# Altium PCB PCB3.PcbDoc
Units mil, origin at the board's own origin, x right, y up, seen from the top; angles counter-clockwise.
Board outline 6000 x 4000 mil, 2 copper layers (Top Layer, Bottom Layer); 30 components, 23 nets, 99 pads, 3 vias.
Unrouted connection lines stored in the file: 30.
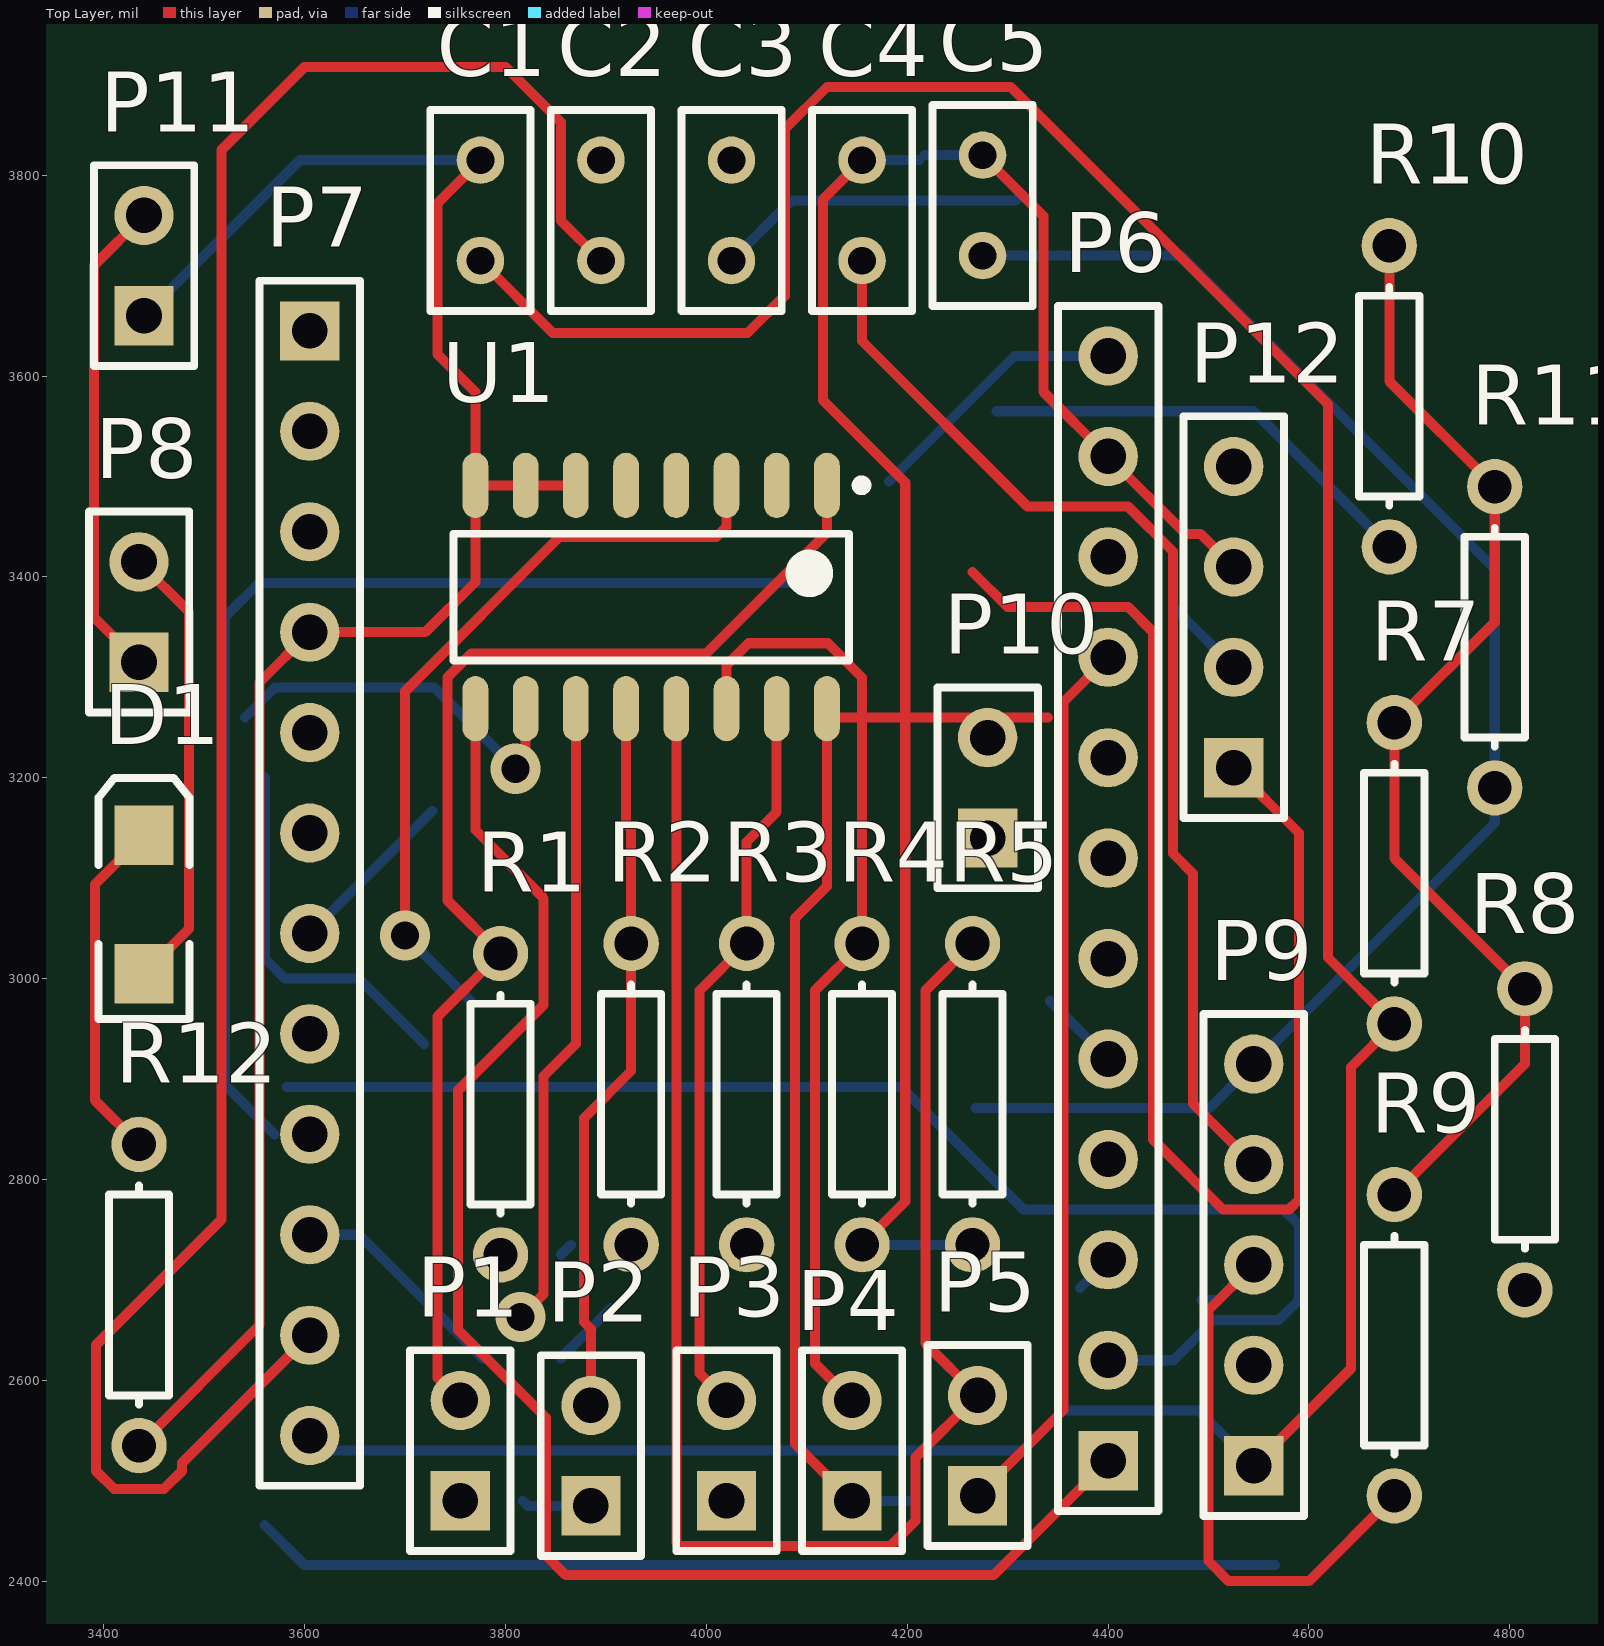
[diagram p0: Top Layer view]
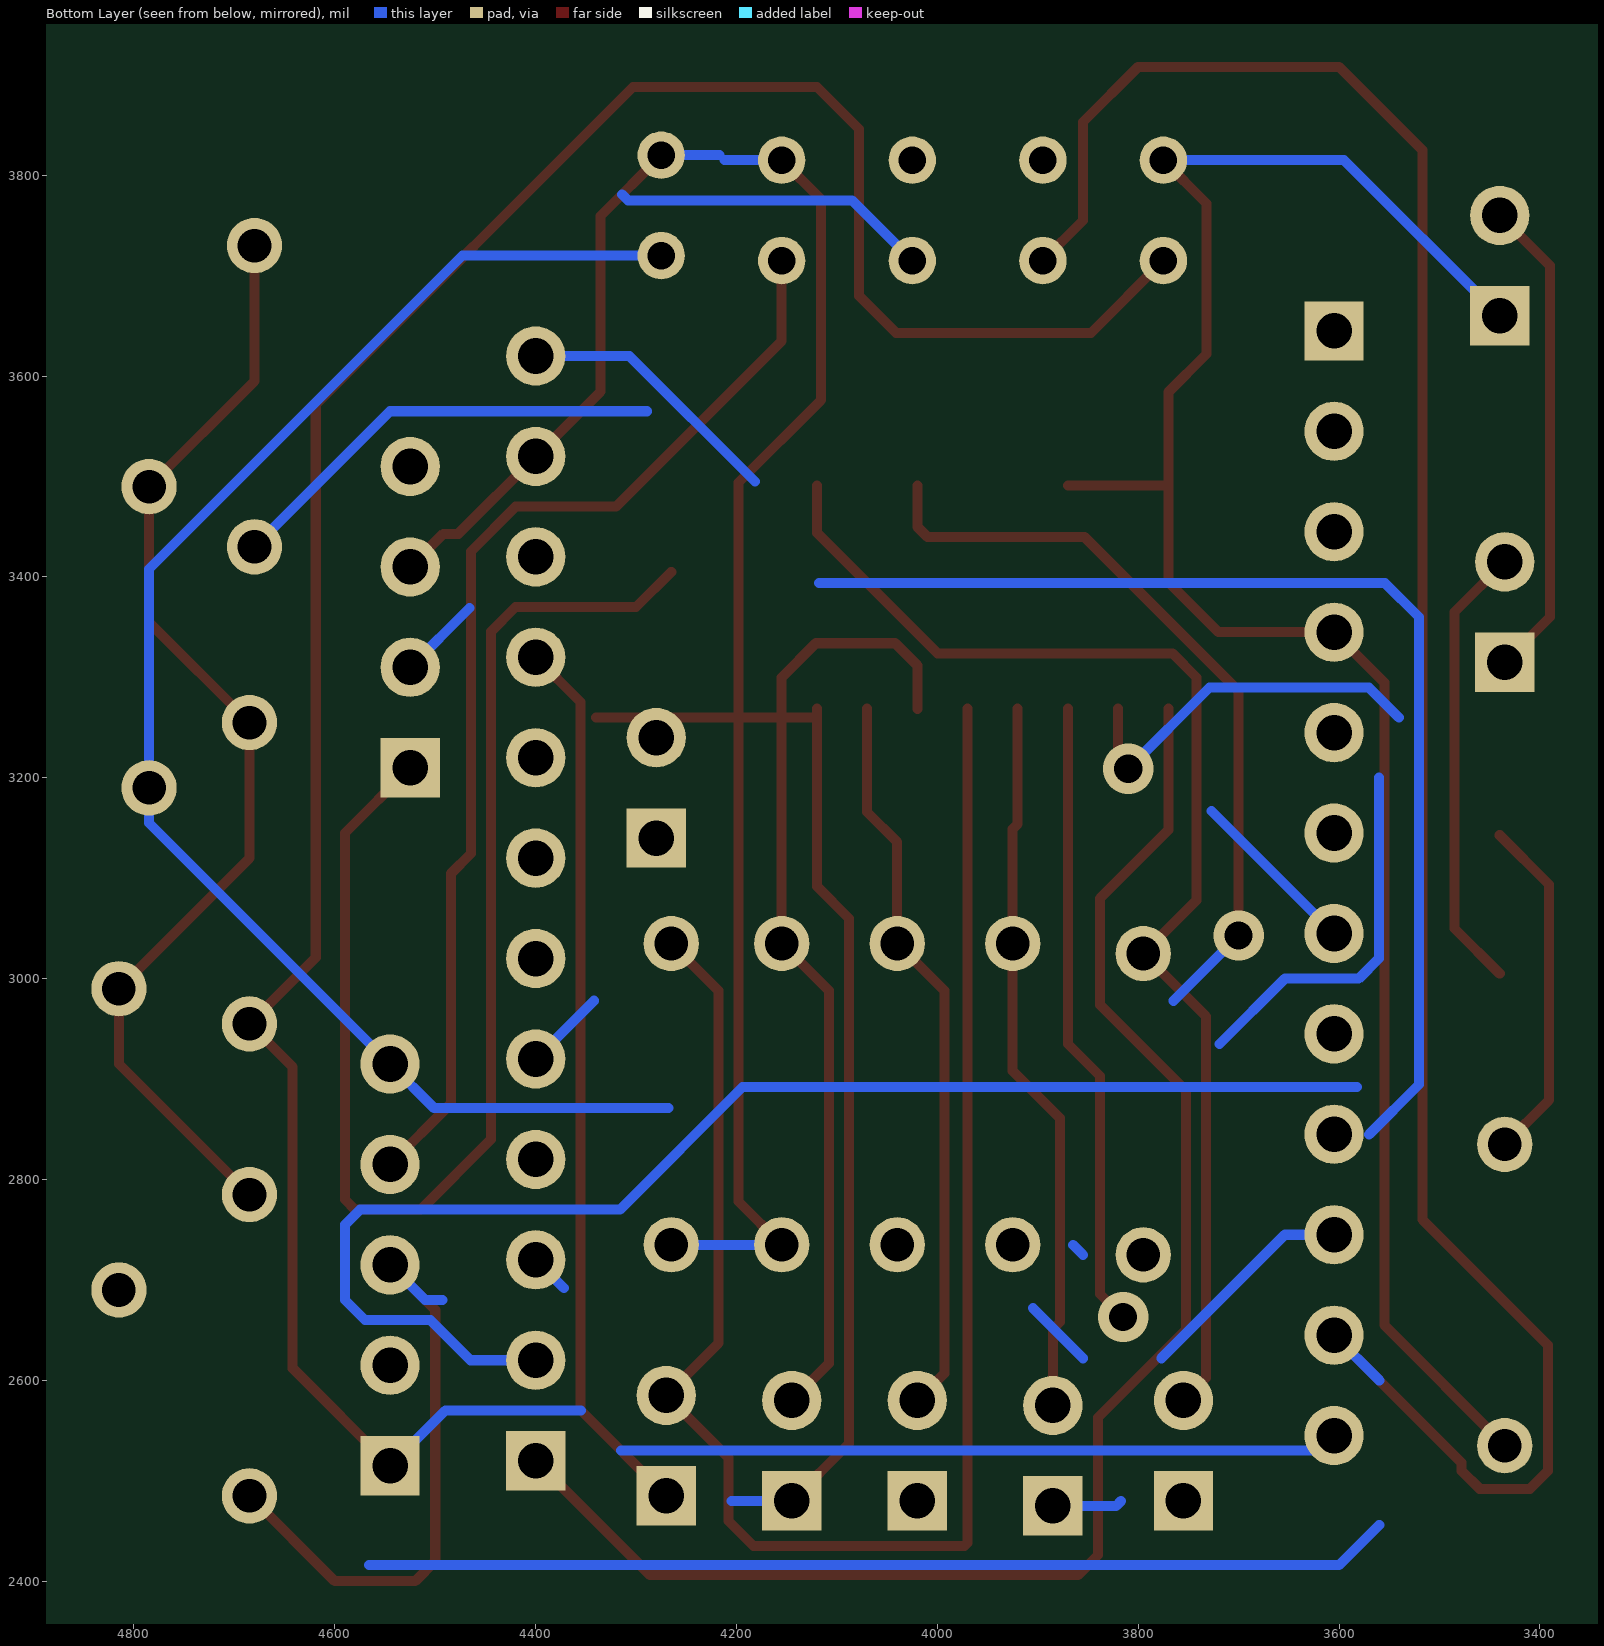
[diagram p1: Bottom Layer view, seen from below]

## Layer stack, top to bottom
Top Solder: solder mask 0.4, Solder Resist, Dk 3.5
Top Layer: signal copper 1.4
Dielectric 1: dielectric 12.6, FR-4, Dk 4.8
Bottom Layer: signal copper 1.4
Bottom Solder: solder mask 0.4, Solder Resist, Dk 3.5

## Board outline
1000,1000 7000,1000 7000,5000 1000,5000

## Design rules (kind name [scope] priority, off if disabled: settings)
Clearance [All] p1: gap=10 ignorepadtopadclearanceinfootprint=FALSE except(0: Arc-Hole Track-Hole SMDPad-Hole THPad-Hole Via-Hole Fill-Hole Poly-Hole Region-Hole Text-Hole)
PolygonConnect [All] p1: connectstyle=Relief reliefconductorwidth=10 reliefentries=4 polygonreliefangle="90 Angle" airgapwidth=10
RoutingVias [All] p1: holewidth=28 width=50 viastyle="Through Hole" minholewidth=28 minwidth=50 maxholewidth=28 maxwidth=50
SolderMaskExpansion [All] p1: expansion=4
Width [All] p1: maxlimit=10 minlimit=10 preferedwidth=10
30 further rules are at their usual default settings.

## Components (designator, comment, footprint, x,y, rotation, side; value= is the part's Value field where it differs from the comment)
C1 "Cap" RAD-0.1 3775,3765 r90 top value=1uF
C2 "Cap" RAD-0.1 3895,3765 r90 top value=1uF
C3 "Cap" RAD-0.1 4025,3765 r90 top value=1uF
C4 "Cap" RAD-0.1 4155,3765 r90 top value=1uF
C5 "Cap" RAD-0.1 4275,3770 r90 top value=1uF
D1 "GREEN" 3.2X1.6X1.1 3440,3073.9 r90 top
P1 "pinky" HDR1X2 3755,2480 r90 top
P2 "ring" HDR1X2 3885,2475 r90 top
P3 "middle" HDR1X2 4020,2480 r90 top
P4 "index" HDR1X2 4145,2480 r90 top
P5 "thumb" HDR1X2 4270,2485 r90 top
P6 "Header 12" HDR1X12 4400,2520 r90 top
P7 "Header 12" HDR1X12 3605,3645 r270 top
P8 "TOGGLE" HDR1X2 3435,3315 r90 top
P9 "Header 5" HDR1X5 4545,2515 r90 top
P10 "IMU HEADER" HDR1X2 4280,3140 r90 top
P11 "BATTERY" HDR1X2 3440,3660 r90 top
P12 "ADAFRUIT BNO055" HDR1X4 4525,3210 r90 top
R1 "Res1" AXIAL-0.3 3795,2875 r90 top value=47K
R2 "Res1" AXIAL-0.3 3925,2885 r90 top value=47K
R3 "Res1" AXIAL-0.3 4040,2885 r90 top value=47K
R4 "Res1" AXIAL-0.3 4155,2885 r90 top value=47K
R5 "Res1" AXIAL-0.3 4265,2885 r90 top value=47K
R7 "Res1" AXIAL-0.3 4685,3105 r90 top value=10M
R8 "Res1" AXIAL-0.3 4815,2840 r90 top value=10M
R9 "Res1" AXIAL-0.3 4685,2635 r90 top value=10M
R10 "Res1" AXIAL-0.3 4680,3580 r90 top value=10M
R11 "Res1" AXIAL-0.3 4785,3340 r90 top value=10M
R12 "Res1" AXIAL-0.3 3435,2685 r90 top value=240
U1 "CD4051BM96G3" D0016A_M 3945,3380 r270 top

## Footprints (in the part's own frame and the unit in brackets; to place one, negate y for a bottom-side part, rotate by r counter-clockwise, add the part's x,y. Pads: shape width x height; smd on the part's side, far side on the other; paste and mask are expansions set on the pad)
3.2X1.6X1.1 [mm] "SMT LED; 2 Flat Leads"
  rect 1.5x1.5 smd: 1(-1.75,0) 2(1.75,0)
  silkscreen extent -2.9,-1.15 3.2,1.15
AXIAL-0.3 [mm] "Axial Device, Thru-Hole; 2 Leads; 0.3 in Pin Spacing"
  round 1.4 hole 0.85: 1(-3.81,0) 2(3.81,0)
  silkscreen extent -2.77,-0.76 2.77,0.76
D0016A_M [mm] "SOIC, 16-Leads, Body 10x4mm, Pitch 1.27mm, IPC Low Density"
  oval 1.65x0.65 smd: 1(-2.825,4.445) 2(-2.825,3.175) 3(-2.825,1.905) 4(-2.825,0.635) 5(-2.825,-0.635) 6(-2.825,-1.905) 7(-2.825,-3.175) 8(-2.825,-4.445) 9(2.825,-4.445) 10(2.825,-3.175) 11(2.825,-1.905) 12(2.825,-0.635) 13(2.825,0.635) 14(2.825,1.905) 15(2.825,3.175) 16(2.825,4.445)
  silkscreen extent -2.95,-5 1.6,5.45, body extent -3,-4.95 3,4.95, height 1.59
HDR1X2 [mm] "Connector; Header; 2 Position"
  rect 1.5x1.5 hole 0.9: 1(0,0)
  round 1.5 hole 0.9: 2(2.54,0)
  silkscreen extent -1.27,-1.27 3.81,1.27
HDR1X4 [mm] "Connector; Header; 4 Position"
  rect 1.5x1.5 hole 0.9: 1(0,0)
  round 1.5 hole 0.9: 2(2.54,0) 3(5.08,0) 4(7.62,0)
  silkscreen extent -1.27,-1.27 8.89,1.27
HDR1X5 [mm] "Connector; Header; 5 Position"
  rect 1.5x1.5 hole 0.9: 1(0,0)
  round 1.5 hole 0.9: 2(2.54,0) 3(5.08,0) 4(7.62,0) 5(10.16,0)
  silkscreen extent -1.27,-1.27 11.43,1.27
HDR1X12 [mm] "Connector; Header; 12 Position"
  rect 1.5x1.5 hole 0.9: 1(0,0)
  round 1.5 hole 0.9: 2(2.54,0) 3(5.08,0) 4(7.62,0) 5(10.16,0) 6(12.7,0) 7(15.24,0) 8(17.78,0) 9(20.32,0) 10(22.86,0) 11(25.4,0) 12(27.94,0)
  silkscreen extent -1.27,-1.27 29.21,1.27
RAD-0.1 [mm] "Radial Cap, Thru-Hole; 2 Leads; 0.1 in Pin Spacing"
  round 1.2 hole 0.7: 1(-1.27,0) 2(1.27,0)
  silkscreen extent -2.54,-1.27 2.54,1.27

## Part data
C1 C2 C3 C4 C5: "Capacitor", LatestRevisionDate=17-Jul-2002, LatestRevisionNote="Re-released for DXP Platform.", PackageDescription="Radial Cap, Thru-Hole; 2 Leads; 0.3 in Pin Spacing", PackageReference=RAD-0.3, Published=8-Jun-2000, Publisher="Altium Limited"
D1: library part LED2, "Typical RED, GREEN, YELLOW, AMBER GaAs LED", LatestRevisionDate=17-Jul-2002, LatestRevisionNote="Re-released for DXP Platform.", PackageDescription="SM LED; 2 Flat Leads", PackageReference=3.2X1.6X1.1, PackageVersion=Feb-2002, Published=8-Jun-2000, Publisher="Altium Limited"
P1 P2 P3 P4 P5 P8 P10 P11: library part "Header 2", "Header, 2-Pin", LatestRevisionDate=17-Jul-2002, LatestRevisionNote="Re-released for DXP Platform.", Publisher="Altium Limited"
P6 P7: "Header, 12-Pin", LatestRevisionDate=17-Jul-2002, LatestRevisionNote="Re-released for DXP Platform.", Publisher="Altium Limited"
P9: "Header, 5-Pin", LatestRevisionDate=17-Jul-2002, LatestRevisionNote="Re-released for DXP Platform.", Publisher="Altium Limited"
P12: library part "Header 4", "Header, 4-Pin", LatestRevisionDate=17-Jul-2002, LatestRevisionNote="Re-released for DXP Platform.", Publisher="Altium Limited"
R1 R2 R3 R4 R5 R7 R8 R9 R10 R11 R12: "Resistor", LatestRevisionDate=17-Jul-2002, LatestRevisionNote="Re-released for DXP Platform.", PackageDescription="Axial Device, Thru-Hole; 2 Leads; 0.3 in Pin Spacing", PackageReference=AXIAL-0.3, Published=8-Jun-2000, Publisher="Altium Limited"
U1: library part CMP-1575-00039-2, "CMOS Single 8-Channel Analog Multiplexer/Demultiplexer with Logic-Level Conversion, D0016A, LARGE T&R", Operating Temperature Range(C)="-55 to 125", Part Number=CD4051B, Rating=Military, Bandwidth(Max)(MHz)=20, Code_IPC="MS-012 variation AC", ComponentLink1Description="Manufacturer URL", ComponentLink1URL=http://www.ti.com/, ComponentLink2Description=Datasheet, ComponentLink2URL=http://www.ti.com/lit/ds/symlink/cd4051b.pdf, Configuration="1 X 1:8 MUX", Crosstalk=Yes, DatasheetVersion=SCHS047G, ICC(Typ)(mA)=0.00008, Output Drive (IOL/IOH)(Max)(mA)=1, Output Type=CMOS, PackageReference=D0016A, PackageVersion=http://www.ti.com/lit/ml/mpds178g/mpds178g.pdf, PartNumber=CD4051BM96G3, Ron(Max)(Ohms)=240, Ron(Typ)(Ohms)=125, VCC(Max)(V)=18, VCC(Min)(V)=5

## Via types
v1: diameter 50, hole 28, Top Layer to Bottom Layer, 3 vias

## Nets (pads, with @x,y where several pads share a name; then routed paths per layer and width w, separated by ;. In a path a pad name is that pad's centre, name@x,y a point inside that pad or via, vN(x,y) a via of type N, cw(c..) or ccw(c..) an arc to the next point about the centre after c; other vN are vias at no path point)
A0: P6.5 U1.3 | length 846.3
  Top Layer w10: v1(3700,3043) 3700,3286.29 3853.71,3440 4010,3440 4020,3450 U1.3
  Bottom Layer w10: v1(3700,3043) 3765,2978 ; 4342,2978 P6.5
A4: P10.1 P12.2 | length 83.4
  Bottom Layer w10: 4466,3369 P12.2
A5: P10.2 P12.1 | length 1345.2
  Top Layer w10: 4265,3405 4300,3370 4420,3370 4444.53,3345.47 4444.53,2840 4514.53,2770 4580,2770 4590,2780 4590,3145 P12.1
GND: C1.2 C2.2 C3.2 C4.2 C5.2 P6.11 P7.4 P11.1 P12.3 R1.1 R2.1 R3.1 R4.1 R5.1 R12.1 U1.6 U1.7 U1.8 | length 3928.3
  Top Layer w10: R12.1 3555,2655 3555,3295 P7.4 3720,3345 3770,3395 U1.8 ; C1.2 3732,3772 3732,3622 3770,3584 U1.8 ; U1.6 U1.7 U1.8 ; R4.1 4198,2778 4198,3494 4116,3576 4116,3776 C4.2 ; C5.2 4335.47,3759.53 4335.47,3584.53 P6.11 4477,3443 4492,3443 P12.3
  Bottom Layer w10: P11.1 3595,3815 C1.2 ; 3855,2725 3865,2735 ; R4.1 R5.1 ; C4.2 4212,3815 ; 4217,3820 C5.2
NetD1_2: D1.2 R12.2 | length 346.3
  Top Layer w10: R12.2 3391,2879 3391,3093.8 D1.2
NetP1_2: P1.2 R1.2 U1.1 | length 1262.1
  Top Layer w10: P1.2 3732.44,2602.56 3732.44,2962.44 R1.2 3742,3078 3742,3300 3766,3324 4000,3324 4120,3444 U1.1
NetP2_2: P2.2 R2.2 U1.12 | length 718.2
  Top Layer w10: P2.2 3885,2651 3878,2658 3878,2861 3925,2908 R2.2 3925,3149 3920,3154 U1.12
NetP3_2: P3.2 R3.2 U1.15 | length 731.9
  Top Layer w10: P3.2 3993,2607 3993,2988 R3.2 4040,3136 4070,3166 U1.15
NetP4_2: P4.2 R4.2 U1.14 | length 956.2
  Top Layer w10: U1.14 4020,3312 4042,3334 4121,3334 4155,3300 R4.2 4108,2988 4108,2617 P4.2
NetP5_2: P5.2 R5.2 U1.13 | length 1722.1
  Top Layer w10: U1.13 3970,2438 3973,2435 4183,2435 4208,2460 4208,2523 P5.2 4218,2637 4218,2988 R5.2
NetP7_9: P7.9 R10.1 | length 1594
  Bottom Layer w10: 3570,2845 3520.47,2894.53 3520.47,3360 3554.47,3394 4118,3394 ; 4289,3565 4545,3565 R10.1
NetP8_1: P8.1 P11.2 | length 484.4
  Top Layer w10: P8.1 3390,3360 3390,3710 P11.2
PIN2: C5.1 P7.5 P9.5 R11.1 | length 1901.1
  Bottom Layer w10: 3560.47,3200.47 3560.47,3020 3580.47,3000 3654,3000 3719,2935 ; 4268,2871 4501,2871 P9.5 4785,3155 R11.1 4785,3408 4473,3720 C5.1
PIN4: P7.7 R7.2 R8.2 R9.2 R10.2 R11.2 | length 1310.1
  Top Layer w10: R10.2 4680,3595 R11.2 4785,3355 R7.2 4685,3120 R8.2 4815,2915 R9.2
  Bottom Layer w10: P7.7 3727,3167
PIN6: C4.1 P9.4 | length 1120.1
  Top Layer w10: C4.1 4155,3635 4320,3470 4420,3470 4464.53,3425.47 4464.53,3124.53 4484.53,3104.53 4484.53,2875.47 P9.4
PIN7: C3.1 P7.10 P9.3 R9.1 | length 1218.6
  Top Layer w10: P9.3 4500,2670 4500,2420 4520,2400 4600,2400 R9.1
  Bottom Layer w10: P7.10 3654,2745 3777,2622 ; 3855,2622 3905,2672 ; C3.1 4085,3775 4308,3775 4314,3781 ; 4493,2680 4510,2680 P9.3
PIN8: C2.1 P7.11 P9.2 R8.1 | length 3291.2
  Top Layer w10: P7.11 3478,2518 3478,2510 3460,2492 3410,2492 3392,2510 3392,2635 3517,2760 3517,3825 3600,3908 3800,3908 3855,3853 3855,3755 C2.1
  Bottom Layer w10: 3560,2456 3600,2416 4566,2416 ; 3560,2600 P7.11
PIN9: C1.1 P7.12 P9.1 R7.1 | length 3268.5
  Top Layer w10: C1.1 3847,3643 4041,3643 4078,3680 4078,3846 4120,3888 4303,3888 4619,3572 4619,3021 R7.1 4642,2912 4642,2612 P9.1
  Bottom Layer w10: P7.12@3605,2530 4315,2530 ; 4355,2570 4490,2570 P9.1
PIN10: P6.1 U1.9 | length 1558.2
  Top Layer w10: U1.9 3770,3148 3838,3080 3838,2974 3752.44,2888.44 3752.44,2650.56 3840,2563 3840,2426 3860,2406 4286,2406 P6.1
PIN11: P6.2 U1.10 | length 1734
  Top Layer w10: v1(3810,3209) 3820,3219 U1.10
  Bottom Layer w10: 3540.47,3260 3570.47,3290 3729,3290 v1(3810,3209) ; 3582,2892 4194,2892 4316,2770 4575,2770 4590,2755 4590,2680 4570,2660 4505,2660 4465,2620 P6.2
PIN12: P6.3 U1.11 | length 668.2
  Top Layer w10: v1(3815,2663) 3838,2686 3838,2903 3870,2935 U1.11
  Bottom Layer w10: 4372,2692 P6.3
RAW: D1.1 P6.12 P8.2 | length 719.4
  Top Layer w10: P8.2 3485,3365 3485,3050 D1.1
  Bottom Layer w10: 4181.71,3495 4306.71,3620 P6.12
VCC: P1.1 P2.1 P3.1 P4.1 P5.1 P6.9 P12.4 U1.16 | length 2284.6
  Top Layer w10: U1.16 U1.16@4120,3260 ; P4.1 4088,2537 4088,3060 4120,3092 U1.16@4120,3260 ; P5.1 4355.47,2570.47 4355.47,3275.47 P6.9 ; U1.16@4120,3260 4340,3260 U1.16@4120,3260
  Bottom Layer w10: 3817,2480 3822,2475 P2.1 ; P4.1 4205,2480
pads on no net: P6.4 P6.6 P6.7 P6.8 P6.10 P7.1 P7.2 P7.3 P7.6 P7.8 U1.2 U1.4 U1.5